# Altium PCB pcb_tigresse_experiment.PcbDoc
Units mm, origin at the board's own origin, x right, y up, seen from the top; angles counter-clockwise.
Board outline 60 x 60 mm, 2 copper layers (TopSIGN, BottomsSIGN); 36 components, 33 nets, 126 pads, 10 vias.
Unrouted connection lines stored in the file: 2.
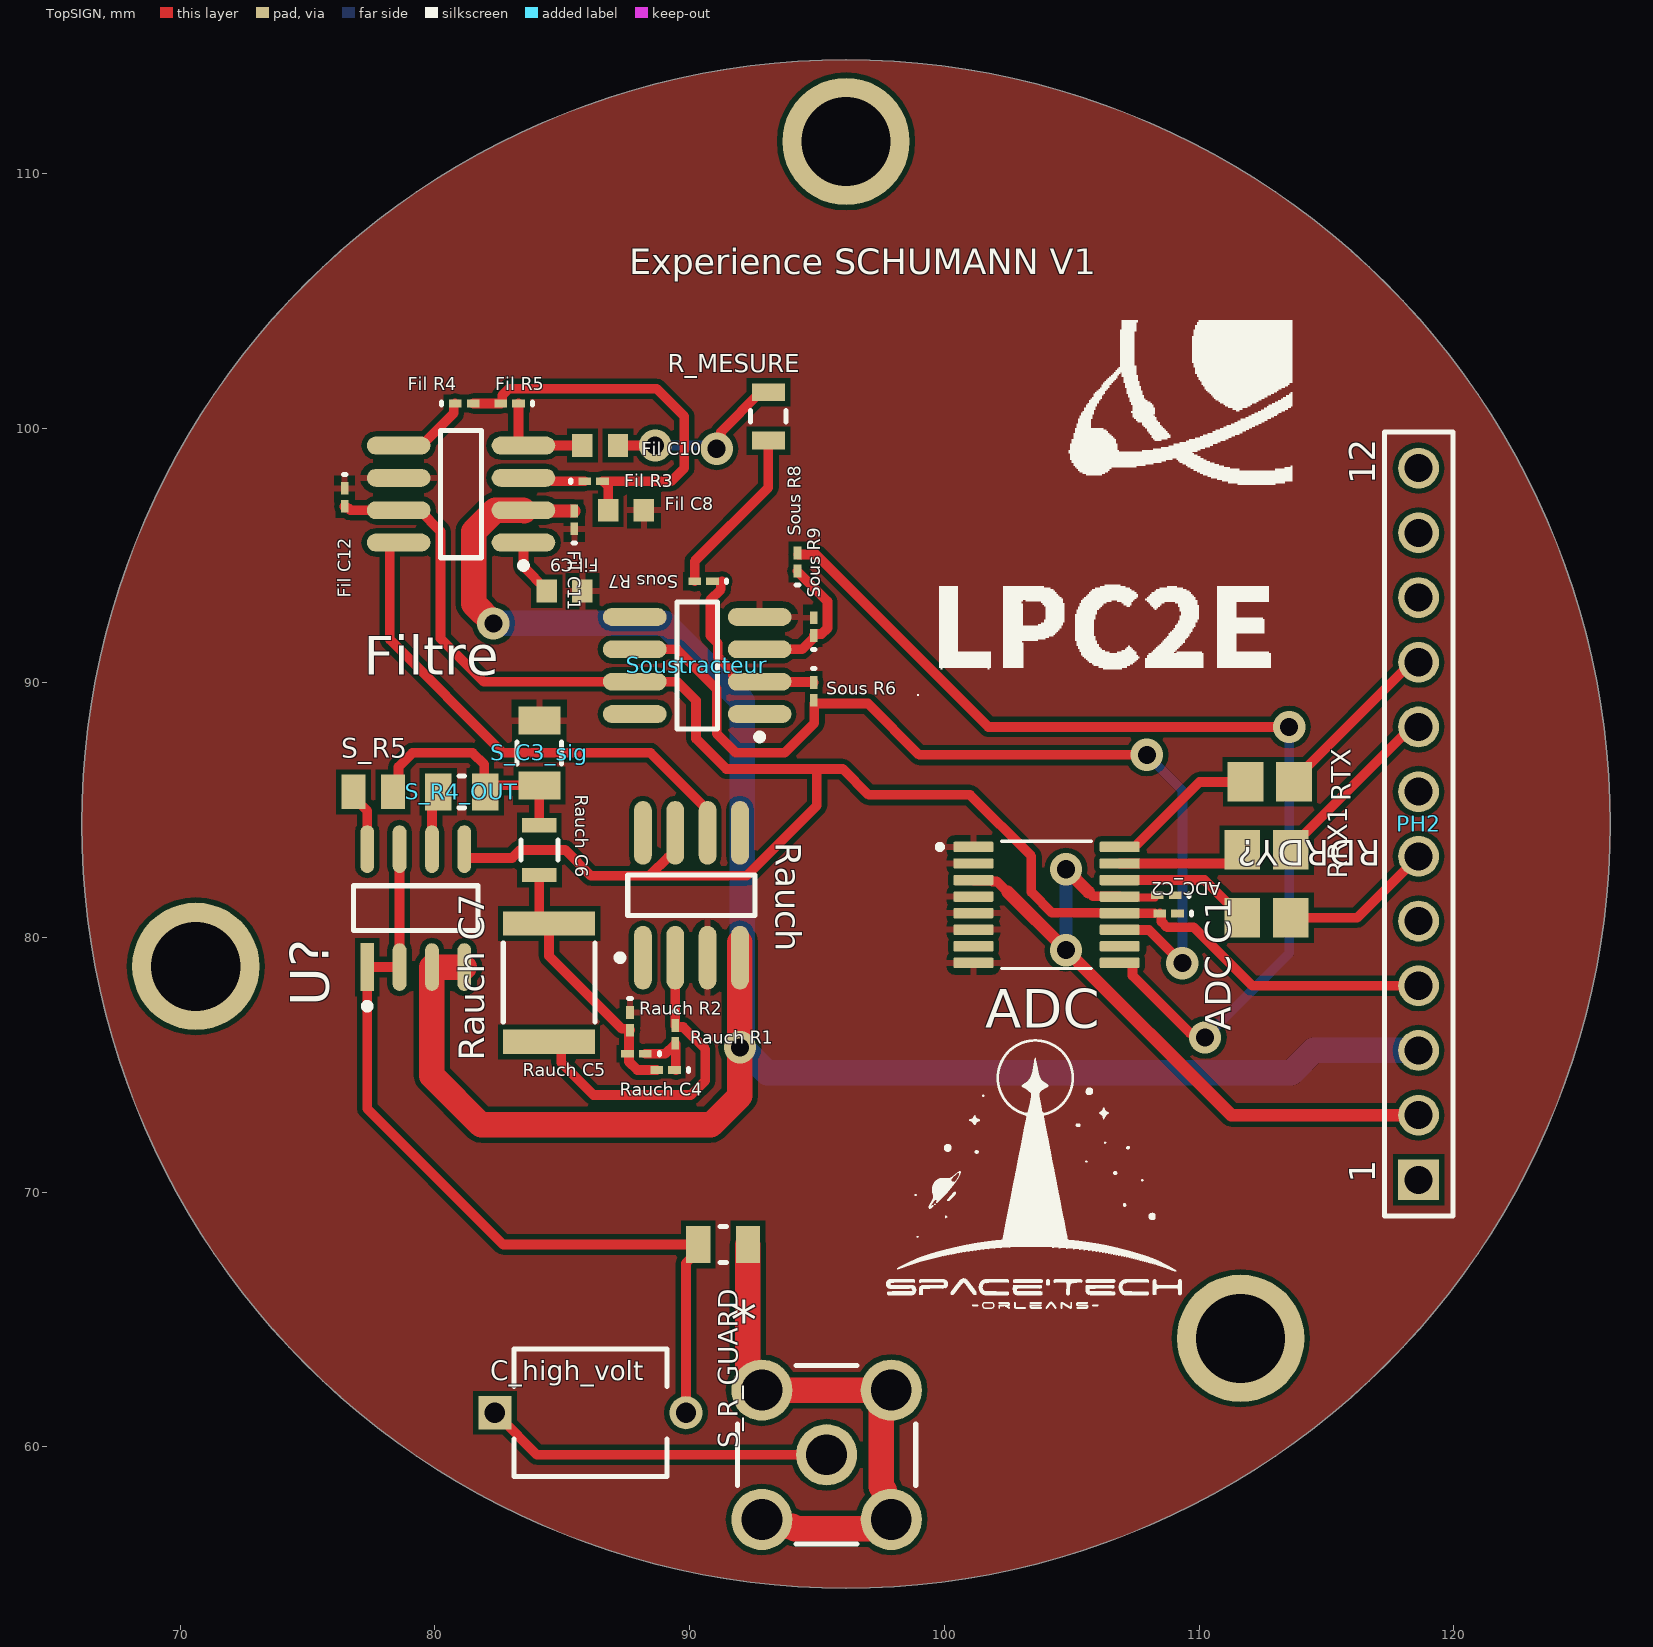
[diagram p0: TopSIGN view]
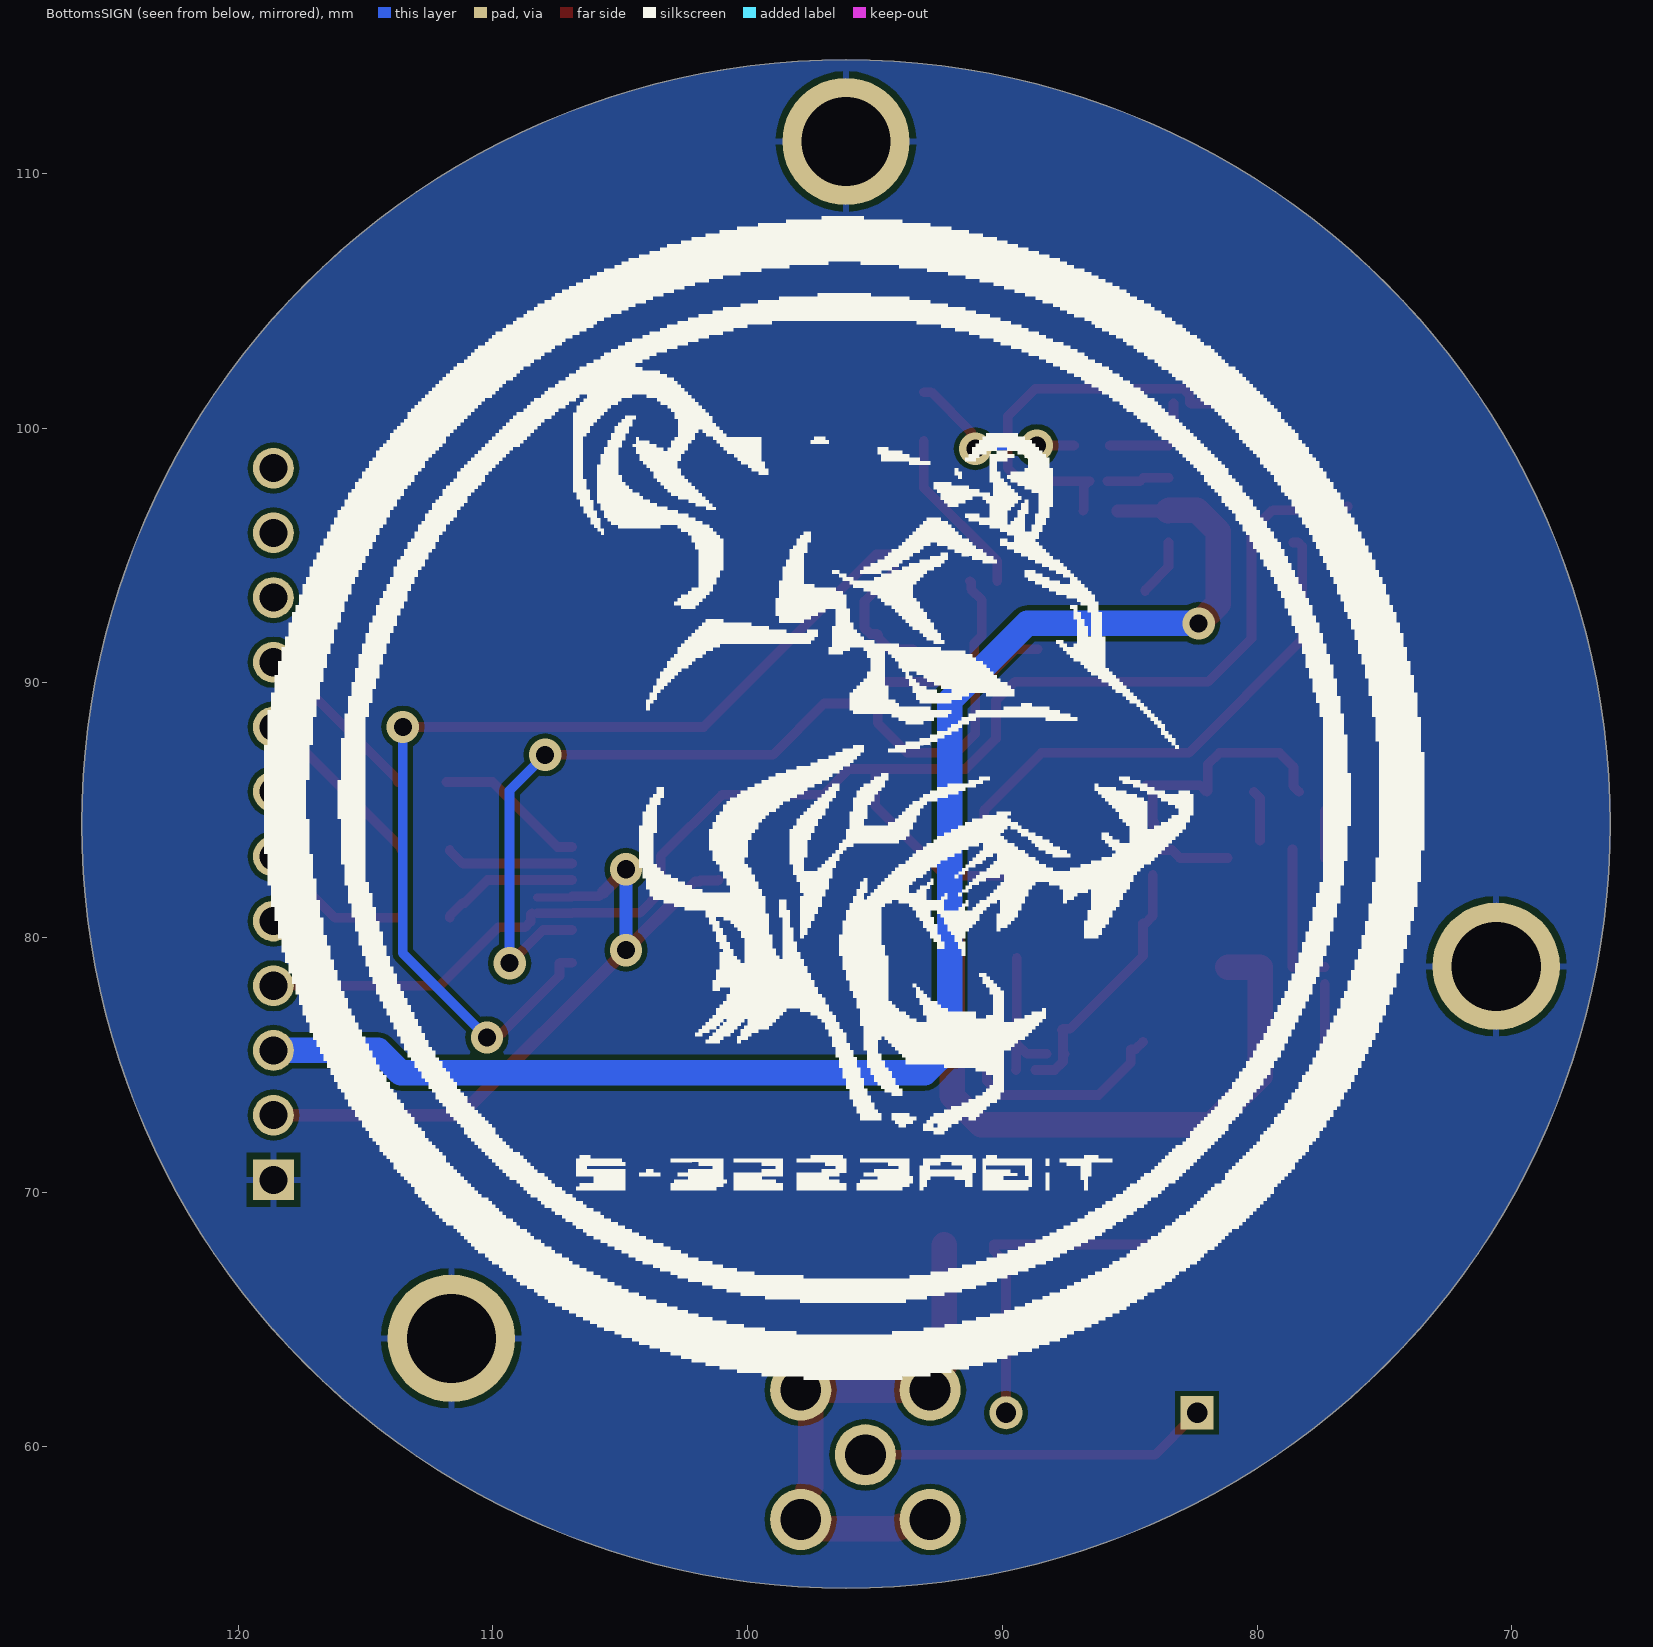
[diagram p1: BottomsSIGN view, seen from below]

## Layer stack, top to bottom
Top Solder: solder mask 0.0102, Solder Resist, Dk 3.5
TopSIGN: signal copper 0.0356
Dielectric 1: dielectric 0.32, FR-4, Dk 4.8
BottomsSIGN: signal copper 0.0356
Bottom Solder: solder mask 0.0102, Solder Resist, Dk 3.5

## Board outline
66.139,84.455 ccw(c96.139,84.455) 96.139,54.455 ccw(c96.139,84.455) 126.139,84.455 ccw(c96.139,84.455) 96.139,114.455 ccw(c96.139,84.455)

## Design rules (kind name [scope] priority, off if disabled: settings)
Clearance [All] p1: gap=0.2 ignorepadtopadclearanceinfootprint=FALSE except(0.254: Arc-Via Track-Via Via-Via; 0.33: Arc-THPad Track-THPad)
Length [InNetClass('Horloge')] p1: maxlimit=12.7 minlimit=0
MatchedLengths MatchLengths_xSignals_ADC_PH1,PH2 [InxSignalClass('xSignals_ADC_PH1,PH2_MatchLengthsClass')] p1: tolerance=2.54 checknetsindiffpair=FALSE checkdiffpairvsdiffpair=TRUE checkxsignals=TRUE checkothers=TRUE
PolygonConnect [All] p1: connectstyle=Relief reliefconductorwidth=0.254 reliefentries=4 polygonreliefangle="90 Angle" airgapwidth=0.254
RoutingVias [All] p1: holewidth=0.711 width=1.27 viastyle="Through Hole" minholewidth=0.711 minwidth=1.27 maxholewidth=0.711 maxwidth=1.27
SolderMaskExpansion [All] p1: expansion=0.102 istentingtop=FALSE
Width [All] p1: maxlimit=1.27 minlimit=0.152 preferedwidth=0.305 minimp=50.000000 maximp=50.000000 favimp=50.000000
30 further rules are at their usual default settings.

## Classes and differential pairs
component class Pamp: * ADC "ADC C1" ADC_C2 C2 C_high_volt "Fil C8" "Fil C9" "Fil C10" "Fil C11" "Fil C12" "Fil R3" "Fil R4" "Fil R5" Filtre R_MESURE Rauch "Rauch C4" "Rauch C5" "Rauch C6" "Rauch C7" "Rauch R1" "Rauch R2" S_C3_sig S_R4_OUT S_R5 S_R_GUARD "Sous R6" "Sous R7" "Sous R8" "Sous R9" Soustracteur U?
component class Data: C15 D3 PH2 RDRDY? RRX1 RTX U7

## Components (designator, comment, footprint, x,y, rotation, side; value= is the part's Value field where it differs from the comment)
* "SMA-J-P-H-ST-TH1" SMA-J-P-H-ST-TH1-Footprint-1 95.377,59.69 r0 top
ADC "ADS122U04IPWR" SOP65P640X120-16N 104.013,81.28 r0 top
"ADC C1" "X7R 50V" 0603 108.712,81.661 r180 top value=100nF
ADC_C2 "X7R 50V" 0603 108.808,80.939 r180 top value=100nF
C_high_volt "DE2B3SA331KA3BY02F" FP-DE2_D6_T5_F7_5_d0_6-0-MFG 86.106,61.341 r0 top
"Fil C8" "NPO/25V" 1608[0603] 87.503,96.774 r180 top value=3.9nF
"Fil C9" "NPO/25V" 1608[0603] 85.09,93.599 r0 top value=2.6nF
"Fil C10" "NPO/25V" 1608[0603] 86.487,99.314 r0 top value=3.9nF
"Fil C11" "X7R 50V" 0603 85.471,96.393 r90 top value=100nF
"Fil C12" "X7R 50V" 0603 76.454,97.282 r270 top value=100nF
"Fil R3" "" 0603 86.233,97.917 r0 top value=100K/1%
"Fil R4" "" 0603 81.153,100.965 r0 top value=100K/1%
"Fil R5" "" 0603 82.931,100.965 r180 top value=100K/1%
Filtre "MAX295CSA" MAXM-S8-5_M 81.026,97.409 r180 top
PH2 "61301211121" 61301211121 118.618,84.455 r90 top
R_MESURE "CRCW08050000ZSTA" FP-CRCW0805-MFG 93.091,100.457 r270 top
Rauch "AD8641ARZ-REEL7" ADI-R-8_M 90.071,81.656 r90 top
"Rauch C4" "X7R 16V" 0603 89.055,74.798 r180 top value=22nF
"Rauch C5" "X7R 25V" 0603 87.912,75.433 r180 top value=120nF
"Rauch C6" "CGA4J3X7T2E104M125AE" FP-CGA4J-IPC_C 84.102,83.434 r270 top
"Rauch C7" "CGA8P3X7T2E105K250KA" FP-CGA8R-IPC_B 84.483,78.227 r270 top
"Rauch R1" "" 0603 89.436,76.195 r270 top value=200K/1%
"Rauch R2" "" 0603 87.658,76.703 r270 top value=100K/1%
RDRDY? "ERA6AEB473V" RESC2013X60X40ML20T25 112.649,80.772 r180 top
RRX1 "ERA6AEB473V" RESC2013X60X40ML20T25 112.649,83.439 r180 top
RTX "ERA6AEB473V" RESC2013X60X40ML20T25 112.776,86.106 r180 top
S_C3_sig "CL31C221JGFNNNF" FP-CL31-IPC_C 84.102,87.244 r90 top
S_R4_OUT "CRCW08051K00FKEA" RESC2013X50X30NL20T20 81.054,85.72 r0 top
S_R5 "ERJ-6ENF1500V" RESC2013X70X40LL20T20 77.581,85.717 r0 top
S_R_GUARD "CRCW0805100KFKEA" FP-CRCW0805-e3-MFG 91.313,67.945 r0 top
"Sous R6" "" 0603 94.869,89.662 r270 top value=150K/1%
"Sous R7" "" 0603 90.551,93.98 r180 top value=240K/1%
"Sous R8" "" 0603 94.234,94.742 r90 top value=270K/1%
"Sous R9" "" 0603 94.869,92.202 r90 top value=120K/1%
Soustracteur "AD8641ARZ-REEL7" ADI-R-8_M 90.297,90.678 r180 top
U? "ADA4530-1ARZ" FP-R-8-IPC_C 79.248,81.153 r90 top

## Footprints (in the part's own frame and the unit in brackets; to place one, negate y for a bottom-side part, rotate by r counter-clockwise, add the part's x,y. Pads: shape width x height; smd on the part's side, far side on the other; paste and mask are expansions set on the pad)
0603 [mm] "Chip Inductor, Body 0.6x0.3mm, IPC High Density"
  rect 0.5x0.3 smd: 1(-0.35,0) 2(0.35,0)
  silkscreen extent -0.9,-0.05 -0.9,0.05, body extent -0.33,-0.18 0.33,0.18, height 0.55
1608[0603] [mm] "Chip Capacitor, Body 1.6x0.8mm, IPC High Density"
  rect 0.8x0.9 smd: 1(-0.7,0) 2(0.7,0)
  body extent -0.87,-0.48 0.87,0.48, height 1.3
61301211121 [mm] "Pin Header, pitch 2.54 mm, THT, Vertical, single row, 12p"
  rect 1.6x1.6 hole 1.1: 1(-13.97,0)
  round 1.6 hole 1.1: 2(-11.43,0) 3(-8.89,0) 4(-6.35,0) 5(-3.81,0) 6(-1.27,0) 7(1.27,0) 8(3.81,0) 9(6.35,0) 10(8.89,0) 11(11.43,0) 12(13.97,0)
  silkscreen extent -15.39,-1.35 15.39,1.35, body extent -15.24,-1.27 15.24,1.27, height 8.57
ADI-R-8_M [mm] "SOIC, 8-Leads, Body 4.9x3.9mm, Pitch 1.27mm, IPC Low Density"
  oval 2.5x0.7 smd: 1(-2.45,1.905) 2(-2.45,0.635) 3(-2.45,-0.635) 4(-2.45,-1.905) 5(2.45,-1.905) 6(2.45,-0.635) 7(2.45,0.635) 8(2.45,1.905)
  silkscreen extent -2.57,-2.5 0.8,2.93, body extent -2,-2.5 2,2.5, height 1.75
FP-CGA4J-IPC_C [mm]
  rect 0.556x1.356 smd paste+0 mask+0: 1(-0.975,0) 2(0.975,0)
  silkscreen extent -0.4,-0.72 0.4,0.72, body extent -1.35,-0.82 1.35,0.82, height 0.25
FP-CGA8R-IPC_B [mm]
  rect 0.953x3.603 smd paste+0 mask+0: 1(-2.325,0) 2(2.325,0)
  silkscreen extent -1.55,-1.8 1.55,1.8, body extent -3.05,-2.05 3.05,2.05, height 0.25
FP-CL31-IPC_C [mm]
  rect 1.105x1.658 smd paste+0 mask+0: 1(-1.276,0) 2(1.276,0)
  silkscreen extent -0.42,-0.87 0.42,0.87, body extent -1.93,-0.97 1.93,0.97, height 0.25
FP-CRCW0805-e3-MFG [mm]
  rect 0.95x1.45 smd paste+0 mask+0: 1(-0.975,0) 2(0.975,0)
  silkscreen extent -0.13,-0.7 0.13,0.7, body extent -1.55,-0.82 1.55,0.82, height 0.25
FP-CRCW0805-MFG [mm]
  rect 0.7x1.3 smd paste+0 mask+0: 1(-0.95,0) 2(0.95,0)
  silkscreen extent -0.23,-0.7 0.23,0.7, body extent -1.4,-0.8 1.4,0.8, height 0.25
FP-DE2_D6_T5_F7_5_d0_6-0-MFG [mm]
  rect 1.3x1.3 hole 0.8 paste-1000 mask+0: 1(-3.75,0)
  round 1.3 hole 0.8 paste-1000 mask+0: 2(3.75,0)
  silkscreen extent -3,-2.5 3,2.5, body extent -4.5,-2.6 4.5,2.6, height 0.25
FP-R-8-IPC_C [mm]
  rect 1.874x0.542 smd paste+0 mask+0: 1(-2.316,1.905)
  rrect100% 1.874x0.542 smd paste+0 mask+0: 2(-2.316,0.635) 3(-2.316,-0.635) 4(-2.316,-1.905) 5(2.316,-1.905) 6(2.316,-0.635) 7(2.316,0.635) 8(2.316,1.905)
  silkscreen extent -3.97,-2.45 0.88,2.45, body extent -3.35,-2.55 3.35,2.55, height 0.25
MAXM-S8-5_M [mm] "SOIC, 8-Leads, Body 4.9x3.9mm, Pitch 1.27mm, IPC Low Density"
  oval 2.5x0.7 smd: 1(-2.45,1.905) 2(-2.45,0.635) 3(-2.45,-0.635) 4(-2.45,-1.905) 5(2.45,-1.905) 6(2.45,-0.635) 7(2.45,0.635) 8(2.45,1.905)
  silkscreen extent -2.58,-2.5 0.8,2.93, body extent -2,-2.5 2,2.5, height 1.75
RESC2013X50X30NL20T20 [mm] "Chip Resistor, 2-Leads, Body 2.00x1.25mm, IPC Medium Density"
  rect 1.05x1.45 smd: 1(-0.925,0) 2(0.925,0)
  silkscreen extent -0.1,-0.63 0.1,0.63, body extent -1.1,-0.72 1.1,0.72, height 0.5
RESC2013X60X40ML20T25 [mm] "Chip Resistor, 2-Leads, Body 2.00x1.25mm, IPC Low Density"
  rect 1.4x1.55 smd: 1(-0.95,0) 2(0.95,0)
  body extent -1.1,-0.72 1.1,0.72, height 0.6
RESC2013X70X40LL20T20 [mm] "Chip Resistor, 2-Leads, Body 2.00x1.25mm, IPC High Density"
  rect 0.95x1.35 smd: 1(-0.775,0) 2(0.775,0)
  body extent -1.1,-0.72 1.1,0.72, height 0.7
SMA-J-P-H-ST-TH1-Footprint-1 [mm]
  round 2.4 hole 1.6: 1(0,0) 2(2.54,-2.54) 3(2.54,2.54) 4(-2.54,2.54) 5(-2.54,-2.54)
  silkscreen extent -3.5,-3.5 3.5,3.5
SOP65P640X120-16N [mm]
  rrect25% 1.57x0.41 smd: 1(-2.87,2.275) 2(-2.87,1.625) 3(-2.87,0.975) 4(-2.87,0.325) 5(-2.87,-0.325) 6(-2.87,-0.975) 7(-2.87,-1.625) 8(-2.87,-2.275) 9(2.87,-2.275) 10(2.87,-1.625) 11(2.87,-0.975) 12(2.87,-0.325) 13(2.87,0.325) 14(2.87,0.975) 15(2.87,1.625) 16(2.87,2.275)
  silkscreen extent -4.29,-2.5 1.77,2.5

## Part data
*: library part CMP-002-00112-1, "Conn SMA 0Hz to 20GHz 50Ohm Solder ST Thru-Hole F Gold Tray"
ADC: Package=None, Availability=Unavailable, MP=ADS122U04IPWR, Price=None
"ADC C1" ADC_C2 "Fil C11" "Fil C12" "Rauch C4" "Rauch C5": library part "Cap CMS", "Capacitor (Semiconductor SIM Model)", LatestRevisionDate=29-May-2009, LatestRevisionNote="IPC-7351 Footprint Added.", PackageDescription="Chip Capacitor", PackageReference=C1206, Published=8-Jun-2000, Publisher="Altium Limited"
C_high_volt: library part CMP-06035-062106-1, "Cap Ceramic Disc 330pF 10% 400VAC Thru-Hole 6.0x5.0x7.5 Bulk"
"Fil C8" "Fil C9" "Fil C10": library part "Cap Semi", "Capacitor (Semiconductor SIM Model)", LatestRevisionDate=29-May-2009, LatestRevisionNote="IPC-7351 Footprint Added.", PackageDescription="Chip Capacitor", PackageReference=C1206, Published=8-Jun-2000, Publisher="Altium Limited"
"Fil R3" "Fil R4" "Fil R5" "Rauch R1" "Rauch R2" "Sous R6" "Sous R7" "Sous R8" "Sous R9": library part "Res CMS", "Resistor", LatestRevisionDate=17-Jul-2002, LatestRevisionNote="Re-released for DXP Platform.", PackageDescription="Axial Device, Thru-Hole; 2 Leads; 0.3 in Pin Spacing", PackageReference=AXIAL-0.3, Published=8-Jun-2000, Publisher="Altium Limited"
Filtre: library part CMP-0026-00196-2, "8th-Order Switched Capacitor Lowpass Filter, Butterworth, Clock Tunable, 0 to 70 degC, 8-Pin SOIC (S8-5)", Generic Part Number=MAX295, Code_JEDEC=MS012, ComponentLink1Description="Manufacturer URL", ComponentLink1URL=http://www.maximintegrated.com/, ComponentLink2Description=Datasheet, ComponentLink2URL=http://datasheets.maximintegrated.com/en/ds/MAX291-MAX296.pdf, ComponentLink3Description="Package Specification", ComponentLink3URL=http://pdfserv.maximintegrated.com/package_dwgs/21-0041.PDF, DatasheetVersion="Rev. 5", Filter Characteristic=Butterworth, Filter Class="Switched Cap", Filter Sections=1, Filter Type=Lowpass, Mounting Technology="Surface Mount", Order Per Filter Section=8, PackageDescription="8-Pin Small-Outline IC, Narrow (0.15in) (S8-5), Body 4.90 x 3.90 mm, Pitch 1.27 mm", PackageReference=S8-5, PackageVersion="Rev. D, 10/2012", PartNumber=MAX295CSA, Program Method=Clock
PH2: library part CMP-1502-01086-1, "THT Vertical Pin Header WR-PHD, Pitch 2.54 mm, Single Row, 12 pins", Contact Resistance=20mOhm, Manufacturer="Wurth Elektronik", Operating Temperature=-40to105degC, Rated Current=3A, Withstanding Voltage=500VAC, Working Voltage=250VAC, Datasheet URL=https://katalog.we-online.de/em/datasheet/6130xx11121.pdf, Gender=Male, Manufacturer URL=http://www.we-online.de, Mounting Technology=THT, Orientation=Vertical, Package Reference=61301211121, Packaging=Bag, Part Number=61301211121, Pin Number=12, Pitch=2.54mm, Publisher=WurthElektronik, Row Number=Single
R_MESURE: library part CMP-2001-04898-2, "RES SMD 0 OHM JUMPER 1/8W 0805", Case Code (Imperial)=0805, Case Code (Metric)=2012, Max Operating Temperature=155°C, Max Power Dissipation=125mW, Min Operating Temperature=-55°C, Package Quantity=5000, Resistance=0R, Resistor Type="Thick Film", Temperature Coefficient=100ppm/°C, Tolerance=1%, Voltage Rating=150V, Case/Package=0805, Construction=Rectangular, Contact Plating=Tin, Depth=1.25mm, Features="Automotive AEC-Q200", Height=0.02inch, Lead Free="Contains Lead", Length=2mm, Military Standard=Not, Mount="Surface Mount", Number of Terminations=2, Packaging="Tape and Reel", Power Dissipation=125mW, Power Rating=125mW, Radiation Hardening=No, RoHS Compliant=No, Series=CRCW, Termination=SMD/SMT, Voltage Rating (DC)=150V, Weight=0.000194oz, Width=0.049inch
Rauch Soustracteur: library part CMP-0384-00603-2, "Single Channel Very Low Input Bias Current Operational Amplifier, 3 MHz BW, 2 V/us SR, Industrial, 8-pin SOIC (R-8), Reel", Amplifiers Per Package=1, Generic Part Number=AD8641, Input Bias Current=250fA, Input Offset Voltage=50uV, Manufacturer="Analog Devices", Code_JEDEC=MS-012-AA, ComponentLink1Description="Manufacturer URL", ComponentLink1URL=http://www.analog.com/en/index.html, ComponentLink2Description=Datasheet, ComponentLink2URL=http://www.analog.com/static/imported-files/data_sheets/AD8641_8642_8643.pdf, ComponentLink3Description="Package Specification", ComponentLink3URL=http://www.analog.com/static/imported-files/packages/PKG_PDF/SOIC_Narrow%20(R)/R_8.pdf, ComponentLink4Description="Reference Circuit", ComponentLink4URL=http://www.analog.com/en/all-operational-amplifiers-op-amps/operational-amplifiers-op-amps/ad8641/products/product.html#product-recommendations, DatasheetVersion="Rev. E", Iq/Amp=250ÂµA, Mounting Technology="Surface Mount", PackageDescription="8-Pin Standard Small Outline Package, Body 3.9 x 4.9 mm, Pitch 1.27 mm", PackageReference=R-8, PackageVersion=060506-A, PartNumber=AD8641ARZ-REEL7, RevisionNote="Reference Circuit URL fixed", Slew Rate=2V/us, Small Signal Bandwidth=3MHz, V Span Max=26V, V Span Min=5V
"Rauch C6": library part CMP-08246-000150-1, "Cap Ceramic 100nF 250V X7T 20% Pad SMD 0805 +125°C Automotive T/R", Capacitance=100nF, Case Code (Imperial)=0805, Case Code (Metric)=2012, Dielectric=X7T, Max Operating Temperature=125°C, Min Operating Temperature=-55°C, Package Quantity=1, Ratings=AEC-Q200, Tolerance=20%, Voltage Rating=250V, Case/Package=0805, Depth=1.25mm, Features="Soft Termination", Height=1.25mm, Length=2mm, Mount="Surface Mount", Packaging="Tape and Reel", Radiation Hardening=No, REACH SVHC="No SVHC", Termination=SMD/SMT, Thickness=0.049inch, Voltage Rating (DC)=250V, Weight=0.000194oz, Width=0.049inch
"Rauch C7": library part CMP-08246-002426-1, "Cap Ceramic 1uF 250V X7T 10% Pad SMD 1812 +125°C Automotive T/R", Capacitance=1uF, Case Code (Imperial)=1812, Case Code (Metric)=4532, Dielectric=X7T, Max Operating Temperature=125°C, Min Operating Temperature=-55°C, Package Quantity=1, Ratings=AEC-Q200, Tolerance=10%, Voltage Rating=250V, Case/Package=1812, Composition=Ceramic, Depth=3.2mm, Height=2.5mm, Length=4.5mm, Mount="Surface Mount", Packaging="Tape and Reel", REACH SVHC="No SVHC", Termination=SMD/SMT, Thickness=0.098inch, Voltage Rating (DC)=250V, Weight=0.000952oz, Width=0.126inch
RDRDY? RRX1 RTX: library part CMP-2001-00645-1, Manufacturer=Panasonic, Part Number=ERA6AEB473V
S_C3_sig: library part CMP-13271-001211-1, "Cap Ceramic 220pF 500V C0G ±5% SMD 1206 +125°C Embossed T/R", Capacitance=220pF, Case/Package=1206, Dielectric=C0G, Max Operating Temperature=125°C, Min Operating Temperature=-55°C, Package Quantity=10000, Tolerance=5%, Voltage Rating=500V, Depth=1.6mm, Height=1.25mm, Length=3.2mm, Mount="Surface Mount", Packaging="Tape and Reel", Radiation Hardening=No, Thickness=0.055inch, Voltage Rating (DC)=500V, Width=0.063inch
S_R4_OUT: library part CMP-1013-00510-2, Manufacturer="Vishay Dale", Part Number=CRCW08051K00FKEA
S_R5: library part CMP-2001-04437-1, Manufacturer=Panasonic, Part Number=ERJ-6ENF1500V
S_R_GUARD: library part CMP-2001-04899-2, "RES Thick Film, 100kΩ, 1%, 0.125W, 100ppm/°C, 0805", Case Code (Imperial)=0805, Case Code (Metric)=2012, Max Operating Temperature=155°C, Min Operating Temperature=-55°C, Package Quantity=5000, Power Rating=125mW, Resistance=100kR, Temperature Coefficient=100ppm/°C, Tolerance=1%, Voltage Rating=150V, Case/Package=0805, Composition="Thick Film", Contact Plating=Tin, Depth=1.25mm, Height=0.45mm, Lead Free="Lead Free", Length=2mm, Military Standard=Not, Mount="Surface Mount", Number of Pins=2, Packaging="Tape and Reel", Radiation Hardening=No, Termination=SMD/SMT, Voltage Rating (DC)=150V, Weight=0.000194oz, Width=1.25mm
U?: library part CMP-09116-000005-1, "IC OPAMP GP 1 CIRCUIT 8SOIC", Input Bias Current=0.00000002uA, Input Offset Voltage=0.008mV, Manufacturer="Analog Devices", Max Dual Supply Voltage=8V, Max Junction Temp=150°C, Max Supply Voltage=16V, Min Dual Supply Voltage=2.25V, Min Supply Voltage=4.5V, Nominal Supply Current=0.9mA, Output Current Per Channel=-30mA, Package=R-8, Temperature="-40°C to +125°C", Temperature Range High=+125°C, Temperature Range Low=-40°C, Voltage Gain=143/150/155dB, Automotive=No, Category=IC, ComponentLink2Description=Datasheet, ComponentLink2URL=https://www.analog.com/media/en/technical-documentation/data-sheets/ADA4530-1.pdf, Device Class L1="Integrated Circuits (ICs)", Device Class L2="Linear ICs", Device Class L3=Instrumentation, Digikey Description="IC OPAMP GP 1 CIRCUIT 8SOIC", Gain Bandwidth=2MHz, Height=1.75mm, Ipc Land Pattern Name=SOIC127P600X155-8, Lead Free=Yes, Manufacturer Part Number=ADA4530-1ARZ, Mouser Description="Instrumentation Amplifiers Ultra low input bias current 16V prec", Number Of Channels=1, Octopart=https://octopart.com/ada4530-1arz-analog+devices-64887651, RoHS=TRUE, Standoff Height=0.1mm

## Free pads (board coordinates)
  round 5 hole 3.5: 6(96.139,111.252) 7(70.612,78.867) 8(111.633,64.262)

## Via types
v1: diameter 1.27, hole 0.711, TopSIGN to BottomsSIGN, 10 vias

## Nets (pads, with @x,y where several pads share a name; then routed paths per layer and width w, separated by ;. In a path a pad name is that pad's centre, name@x,y a point inside that pad or via, vN(x,y) a via of type N, cw(c..) or ccw(c..) an arc to the next point about the centre after c; other vN are vias at no path point)
A-5V: "Fil C11.2" Filtre.2
AC: "Sous R6.2" ADC.11 Soustracteur.6 | length 35.9
  TopSIGN w0.381: Soustracteur.6@88.609,91.313 89.509,91.313 91.059,89.763 91.059,88.011 91.821,87.249 93.726,87.249 94.898,88.421 94.898,89.183 96.999,89.183 99.014,87.168 v1(107.95,87.168) ; ADC.11 106.898,80.29 108.033,80.29 109.329,78.994 v1(109.347,78.994)
  BottomsSIGN w0.381: v1(107.95,87.168) 109.347,85.771 v1(109.347,78.994)
AGND: "Fil C8.1" "Fil C9.2" "Fil C11.1" "Fil C12.1" "Rauch R2.1" "Sous R9.2" ADC.1 ADC.2 ADC.4 ADC.5 ADC.6 ADC.8 ADC.10 ADC_C2.1 Filtre.6 Rauch.3 S_C3_sig.2 Soustracteur.4
DGND: "ADC C1.1" pad.6 pad.7 pad.8 PH2.1
GUARD: C_high_volt.2 S_R_GUARD.1 U?.1 U?.2 U?.7 | length 32.8
  TopSIGN w0.381: U?.1@77.343,78.17 77.343,73.279 82.677,67.945 S_R_GUARD.1 90.338,67.695 89.856,67.213 C_high_volt.2 ; U?.1 U?.2 U?.7
GUARD_EXT: *.2 *.3 *.4 *.5 S_R_GUARD.2 | length 21.8
  TopSIGN w1: S_R_GUARD.2 92.288,63.158 92.837,62.609 *.4 97.515,62.23 *.3 97.917,61.851 97.515,61.45 97.515,58.436 97.649,58.302 97.649,57.418 *.2 97.538,57.15 97.18,56.792 94.123,56.792 94.033,56.882 93.105,56.882 *.5
Net*_1: *.1 C_high_volt.1 | length 13.4
  TopSIGN w0.381: C_high_volt.1@82.55,61.147 84.007,59.69 *.1
"NetADC C1_2": "ADC C1.2" ADC.3 ADC.13 PH2.2 | length 28.4
  TopSIGN w0.254: 108.057,81.562 108.067,81.572
  TopSIGN w0.3: ADC.13@106.883,81.572 108.067,81.572 108.273,81.572
  TopSIGN w0.381: ADC.3 101.158,82.24 101.848,82.24 101.888,82.201 102.06,82.201 102.472,81.788 102.489,81.788 ; 105.664,81.788 105.832,81.62 106.868,81.62 ADC.13
  TopSIGN w0.5: 102.489,81.788 v1(104.775,79.502) ; v1(104.775,82.677) 105.664,81.788 ; v1@104.782,79.509 111.267,73.025 PH2.2
  BottomsSIGN w0.5: v1(104.775,79.502) v1(104.775,82.677)
NetADC_12: "Fil C12.2" ADC.12 ADC_C2.2 Filtre.7 PH2.4 Rauch.7 Soustracteur.7 U?.5 | length 72.4
  TopSIGN w0.381: 76.454,96.932 76.454,96.913 76.495,96.872 76.579,96.872 76.677,96.774 79.39,96.774 80.216,95.947 80.216,91.742 81.915,90.043 Soustracteur.7 89.509,90.043 90.249,89.302 90.249,87.805 91.44,86.614 94.996,86.614 ; U?.5@81.153,83.12 83.033,83.12 83.347,83.434 85.118,83.434 86.128,82.423 88.515,82.423 ; Rauch.7@89.436,83.292 89.288,83.145 89.152,83.145 88.472,82.465 88.515,82.423 ; ADC_C2.2@108.263,80.955 ADC.12 106.868,80.97 104.228,80.97 103.417,81.781 103.417,83.192 101.01,85.598 97.028,85.598 96.021,86.605 96.012,86.614 94.996,86.614 ; ADC_C2.2 108.477,80.939 108.517,80.899 108.517,80.627 108.746,80.399 109.794,80.399 112.088,78.105 PH2.4 ; 88.515,82.423 92.24,82.423 94.996,85.179 94.996,86.614
NetADC_14: ADC.14 RDRDY?.2 | length 5.5
  TopSIGN w0.381: ADC.14 110.216,82.255 111.115,81.356 111.19,81.356 111.699,80.847 RDRDY?.2
NetADC_15: ADC.15 RRX1.2 | length 5.1
  TopSIGN w0.381: ADC.15 111.19,82.905 111.699,83.415 RRX1.2
NetADC_16: ADC.16 RTX.2 | length 6
  TopSIGN w0.381: ADC.16 107.463,83.555 110.014,86.106 RTX.2
"NetFil C8_2": "Fil C8.2" "Fil R3.2" "Fil R4.2" "Fil R5.2" | length 15.8
  TopSIGN w0.381: 81.503,100.965 82.581,100.965 82.6,100.965 82.64,101.005 82.64,101.277 82.91,101.546 88.7,101.546 89.789,100.457 89.789,98.425 89.281,97.917 86.602,97.917 ; 86.583,97.917 86.602,97.917 ; 86.82,96.757 86.803,96.774 86.803,97.716 86.602,97.917
"NetFil C9_1": "Fil C9.1" Filtre.1 | length 2.3
  TopSIGN w0.381: Filtre.1 83.476,94.563 84.39,93.649 84.39,93.599
"NetFil C10_1": "Fil C10.1" "Fil R5.1" Filtre.4 | length 3.8
  TopSIGN w0.381: Filtre.4@83.281,99.461 83.281,100.965 ; Filtre.4 85.787,99.314
"NetFil C10_2": "Fil C10.2" R_MESURE.1 | length 6.3
  TopSIGN w0.381: 87.187,99.314 v1@88.392,99.314 ; v1(91.059,99.187) 91.229,99.357 91.229,99.845 92.791,101.407 R_MESURE.1
  BottomsSIGN w0.381: v1(88.646,99.314) v1@90.551,99.314
"NetFil R3_1": "Fil R3.1" Filtre.3 | length 2.5
  TopSIGN w0.381: Filtre.3 84.462,98.044 84.589,97.917 85.883,97.917
"NetFil R4_1": "Fil R4.1" Filtre.5 | length 3.1
  TopSIGN w0.381: Filtre.5 79.476,99.314 80.744,100.582 80.744,100.925 80.784,100.965 80.803,100.965
NetFiltre_8: Filtre.8 Rauch.6 | length 20.2
  TopSIGN w0.381: Filtre.8 78.379,95.504 78.232,95.357 78.232,91.694 82.677,87.249 88.462,87.249 90.706,85.006 Rauch.6
NetPH2_3: PH2.3 Rauch.4 U?.3 U?.4 | length 85.2
  TopSIGN w0.5: 83.507,96.743 85.471,96.743
  TopSIGN w1: U?.4 U?.3 79.883,74.571 81.81,72.644 90.838,72.644 91.976,73.782 v1(91.976,75.687) Rauch.4 Rauch.4@91.976,79.806 ; v1(82.296,92.329) 81.526,93.099 81.526,95.939 82.361,96.774 83.476,96.774 83.507,96.743
  BottomsSIGN w1: v1(82.296,92.329) 89.027,92.329 92.075,89.281 v1@92.075,75.76 ; v1@91.976,75.76 v1(91.976,75.687) 92.049,75.687 93.051,74.684 113.618,74.684 114.499,75.565 PH2.3
NetPH2_6: PH2.6 RDRDY?.1 | length 6.1
  TopSIGN w0.381: RDRDY?.1@113.599,80.847 RDRDY?.1 116.205,80.772 PH2.6
NetPH2_8: PH2.8 RRX1.1 | length 7.1
  TopSIGN w0.381: RRX1.1 113.599,83.514 118.35,88.265 PH2.8
NetPH2_9: PH2.9 RTX.1 | length 6.9
  TopSIGN w0.381: RTX.1 113.726,86.181 118.35,90.805 PH2.9
NetR_MESURE_2: "Sous R7.2" R_MESURE.2 | length 6.7
  TopSIGN w0.381: 90.201,93.98 90.201,94.773 93.091,97.663 R_MESURE.2
"NetRauch C4_1": "Rauch C4.1" "Rauch C5.1" "Rauch R1.2" | length 2.4
  TopSIGN w0.381: 88.262,75.433 89.043,75.433 89.436,75.826 89.436,75.845 89.451,75.829 89.451,74.813 89.467,74.798
"NetRauch C4_2": "Rauch C4.2" "Rauch C5.2" "Rauch C6.2" "Rauch C7.1" "Rauch R2.2" | length 10.3
  TopSIGN w0.381: 84.102,82.459 84.102,80.838 84.388,80.552 84.483,80.552 84.483,79.276 87.346,76.412 87.617,76.412 87.658,76.372 87.658,76.353 87.617,76.312 87.617,75.473 87.577,75.433 ; 87.562,75.433 87.577,75.433 ; 88.705,74.798 87.944,74.798 87.621,75.121 87.621,75.392 87.581,75.433 87.577,75.433
"NetRauch C7_2": "Rauch C7.2" "Rauch R1.1" Rauch.2 | length 13
  TopSIGN w0.381: 84.483,75.902 84.769,75.616 84.965,75.616 84.965,75.077 86.227,73.815 90.046,73.815 90.617,74.386 90.617,75.616 89.747,76.485 89.476,76.485 89.436,76.526 89.436,76.545 Rauch.2
NetS_R4_OUT_1: S_R4_OUT.1 U?.6 | length 2
  TopSIGN w0.381: U?.6@79.883,83.805 79.883,85.474 S_R4_OUT.1
NetS_R5_1: S_R5.1 U?.8 | length 2.8
  TopSIGN w0.381: S_R5.1 76.806,85.517 77.343,84.98 U?.8@77.343,83.12
"NetSous R6_1": "Sous R6.1" "Sous R7.1" Soustracteur.2 | length 7.6
  TopSIGN w0.381: 91.282,93.98 91.263,93.98 91.222,93.939 91.222,93.757 91.222,93.668 90.805,93.251 90.805,91.847 91.107,91.546 91.107,91.006 91.688,90.425 91.688,90.289 91.933,90.043 92.721,90.043 92.737,90.027 94.854,90.027 94.869,90.012
"NetSous R8_1": "Sous R8.1" "Sous R9.1" Soustracteur.3 | length 4.9
  TopSIGN w0.381: Soustracteur.3@93.509,91.313 94.416,91.313 94.828,91.725 ; 94.234,94.392 94.234,94.373 95.409,93.198 95.409,92.14 95.181,91.912 94.909,91.912 94.869,91.871 94.869,91.852
REF5V: "Sous R8.2" ADC.9 | length 40.5
  TopSIGN w0.381: 94.274,95.032 94.96,95.032 101.727,88.265 v1(113.538,88.265) ; ADC.9 107.372,79.005 107.386,78.99 107.386,78.502 109.645,76.243 110.066,76.243 v1(110.236,76.073)
  BottomsSIGN w0.381: v1(110.236,76.073) 113.538,79.375 v1(113.538,88.265)
SIG: "Rauch C6.1" S_C3_sig.1 S_R4_OUT.2 S_R5.2 | length 10.1
  TopSIGN w0.381: S_R5.2 78.57,85.932 78.57,86.698 79.121,87.249 81.481,87.249 81.937,86.793 81.937,85.761 S_R4_OUT.2 82.239,85.98 S_C3_sig.1@84.356,85.98 ; 84.014,84.496 84.102,84.409 S_C3_sig.1
pads on no net: ADC.7 PH2.5 PH2.7 PH2.10 PH2.11 PH2.12 Rauch.1 Rauch.5 Rauch.8 Soustracteur.1 Soustracteur.5 Soustracteur.8

## Polygon pours and split planes (outlines as drawn)
no net on Top Solder "NONET_L-01_P-001" (solid): 74.384,102.375 75.933,102.375 75.932,102.425 cw(c76.886,102.425) 76.835,103.378 94.549,103.378 cw(c94.544,102.273) 95.649,102.269 95.649,71.769 97.149,71.769 97.149,102.269 ccw(c94.549,102.269) 94.549,104.869 76.878,104.869 ccw(c76.878,102.375)
DGND on Top Solder "NONET_L-01_P-001" (solid): 75.928,71.848 ccw(c77.033,71.843) 77.028,70.739 94.742,70.739 ccw(c94.691,71.691) 95.645,71.691 95.644,71.742 97.193,71.742 cw(c94.699,71.742) 94.699,69.248 77.028,69.248 cw(c77.028,71.848) 74.428,71.848 74.428,102.348 75.928,102.348
DGND on BottomsSIGN "DGND_L02_P003" (solid, pour order 3): 66.139,84.455 ccw(c96.139,84.455) 96.139,54.455 ccw(c96.139,84.455) 126.139,84.455 ccw(c96.139,84.455) 96.139,114.455 ccw(c96.139,84.455)
AGND on TopSIGN "AGND_L01_P002" (solid, pour order 2): 66.139,84.455 ccw(c96.139,84.455) 96.139,54.455 ccw(c96.139,84.455) 126.139,84.455 ccw(c96.139,84.455) 96.139,114.455 ccw(c96.139,84.455)

## Silkscreen, mask and mechanical layers (free items; w line width, h text height)
Top Overlay:
  drawing of 52 lines, arcs and shapes, not listed
  text "Experience SCHUMANN V1" at 87.63,106.045 h1
Bottom Overlay:
  drawing of 32 lines, arcs and shapes, not listed
Top Solder:
  lines w0.254: 75.932,102.425 cw(c76.886,102.425) 76.835,103.378 94.549,103.378 cw(c94.544,102.274) 95.649,102.269 95.649,71.769 97.149,71.769 97.149,102.269 ccw(c94.549,102.269) 94.549,104.869 76.835,104.869 ; 75.933,102.375 74.384,102.375 cw(c76.878,102.375) 76.878,104.869 ; 94.699,69.248 ccw(c94.699,71.742) 97.193,71.742 95.644,71.742 ; 94.742,69.248 77.028,69.248 cw(c77.028,71.848) 74.428,71.848 74.428,102.348 75.928,102.348 75.928,71.848 ccw(c77.033,71.843) 77.028,70.739 94.742,70.739 ccw(c94.691,71.691) 95.645,71.691
Outline layer:
  circle w0.254: c96.139,84.455 r30

## Text inside footprints (layer, text, board x,y; h text height)
PH2: Top Overlay "12" at 116.918,97.795 h1.02 r90; Top Overlay "1" at 116.918,70.365 h1.02 r90